# EAGLE board Melanie-AD (EAGLE 4.11)
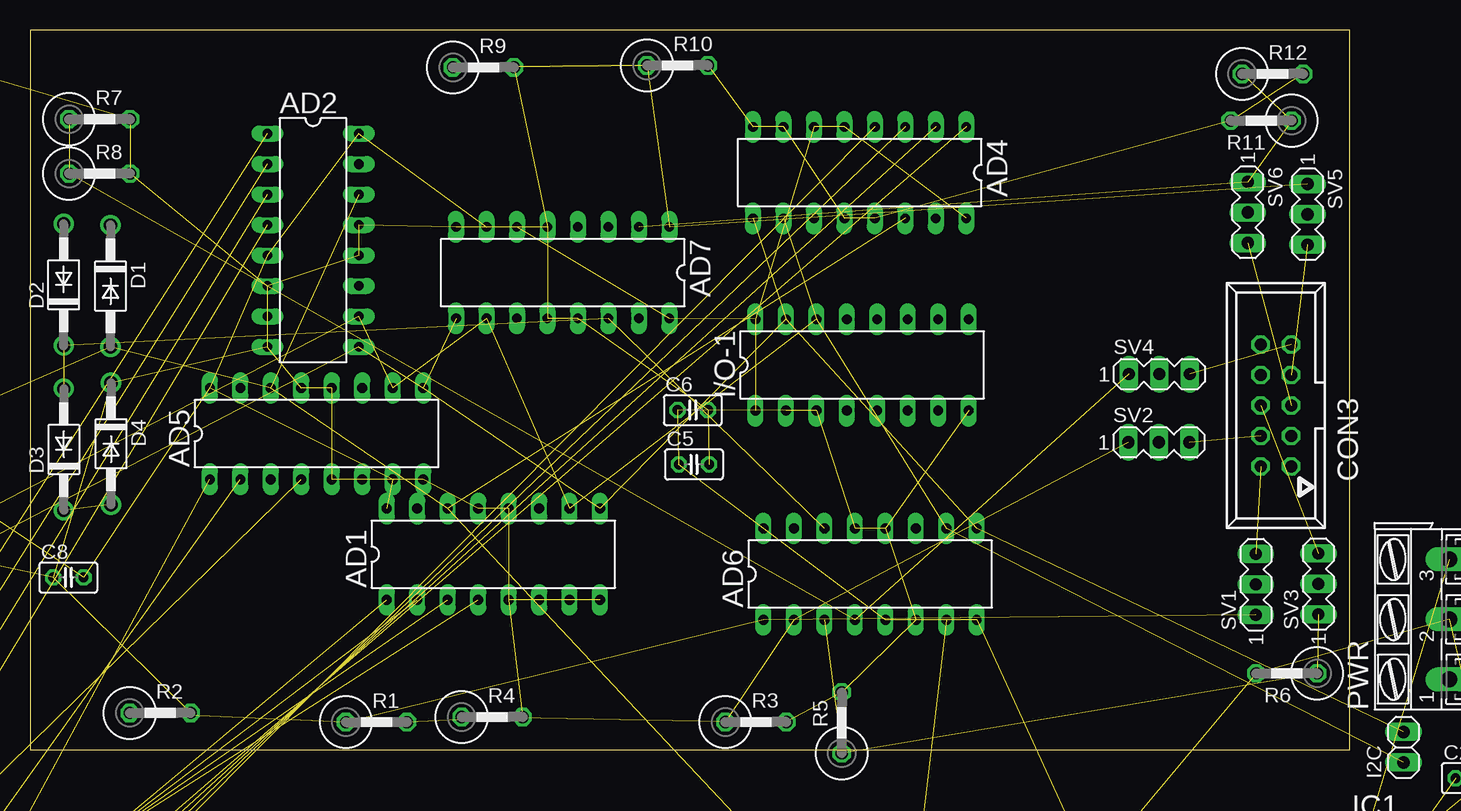
[diagram p0: board, top side]
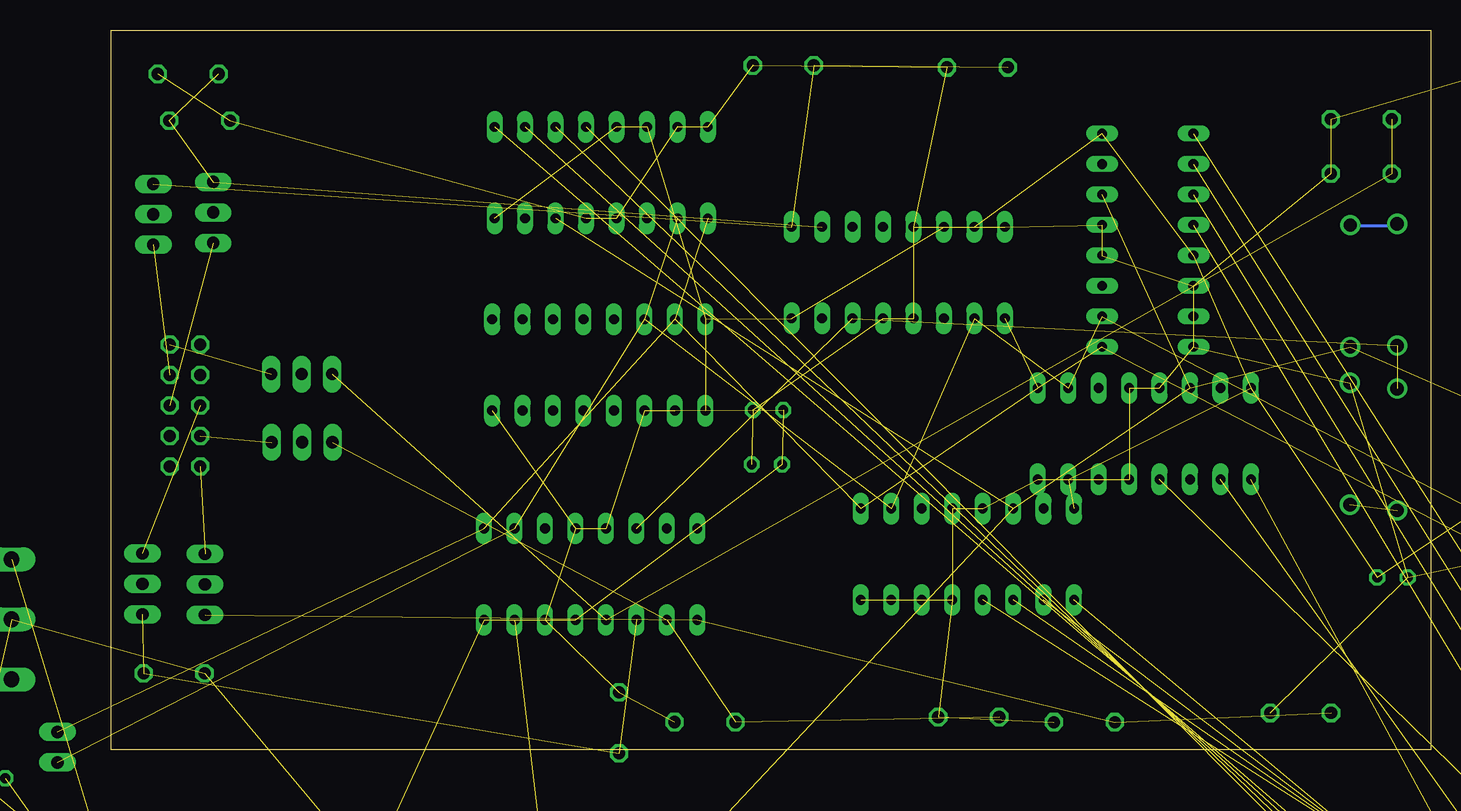
[diagram p1: board, bottom side, seen from below]

Size 110 x 60 mm. Coordinates in mm from the lower left corner, seen from the top.
Outline: 0,0 110,0 110,60 0,60 0,0
Copper layers (1*16): Top 0.035mm / dielectric 1.5mm / Bottom 0.035mm
Design rules "default": minimum track width 10mil, minimum drill 24mil, track to track 8mil, track to pad 8mil, pad to pad 8mil, via to via 8mil, smd to smd 8mil, copper to edge 40mil, drill to drill 8mil, minimum pad ring 10mil, minimum via ring 8mil, stop-mask expansion 4mil, vias tented up to drill 0mil, thermal gap 10mil

## Footprints (pad centres in the part's own frame; a part is rotated, then mirrored left to right if it is on the bottom)
DIL16 = drill 0.813 long: 1 -8.89,-3.81; 2 -6.35,-3.81; 3 -3.81,-3.81; 4 -1.27,-3.81; 5 1.27,-3.81; 6 3.81,-3.81; 7 6.35,-3.81; 8 8.89,-3.81; 9 8.89,3.81; 10 6.35,3.81; 11 3.81,3.81; 12 1.27,3.81; 13 -1.27,3.81; 14 -3.81,3.81; 15 -6.35,3.81; 16 -8.89,3.81
EB22,5D = drill 2.007 pad 4.597 round: + -5.08,0 | drill 2.007 pad 4.597 octagon: - 5.08,0
C025-025X050 = drill 0.813 octagon: 1 -1.27,0; 2 1.27,0
057-010-1 = drill 1 octagon: 1 -5.08,-1.27; 2 -5.08,1.27; 3 -2.54,-1.27; 4 -2.54,1.27; 5 0,-1.27; 6 0,1.27; 7 2.54,-1.27; 8 2.54,1.27; 9 5.08,-1.27; 10 5.08,1.27
DO41-10 = drill 1.118 round: A 5.08,0; C -5.08,0
1X02 = drill 1.016 long: 1 -1.27,0; 2 1.27,0
TO220H = drill 1.118 long: 1 -2.54,-10.16; 2 0,-10.16; 3 2.54,-10.16 | hole 3.302: 0,4.826
AK300/3 = drill 1.321 long: 1 -5.004,0; 2 0,0; 3 5.004,0
0414V = drill 1.016 octagon: 1 -2.54,0; 2 2.54,0
0309/10 = drill 0.813 octagon: 1 -5.08,0; 2 5.08,0
MA03-1 = drill 1.016 long: 1 -2.54,0; 2 0,0; 3 2.54,0

## Placement (x,y rotation side)
AD1  PCF8591P  [DIL16]  38.63,16.28 0 top
AD2  PCF8591P  [DIL16]  23.6,42.47 270 top
AD3  PCF8591P  [DIL16]  -20.45,19.54 270 top  (outside the outline)
AD4  PCF8591P  [DIL16]  69.16,48.11 180 top
AD5  PCF8591P  [DIL16]  23.88,26.34 0 top
AD6  PCF8591P  [DIL16]  70.04,14.63 0 top
AD7  PCF8591P  [DIL16]  44.4,39.76 180 top
C1  10000uF  [EB22,5D]  -22.23,-61.76 0 top  (outside the outline)
C2  100n  [C025-025X050]  120.11,-2.39 0 top  (outside the outline)
C3  100n  [C025-025X050]  87.2,-10.05 0 top  (outside the outline)
C4  100n  [C025-025X050]  -17.97,59.95 0 top  (outside the outline)
C5  100n  [C025-025X050]  55.35,23.77 0 top
C6  100n  [C025-025X050]  55.25,28.31 0 top
C7  10000uF  [EB22,5D]  -22.23,-84.62 0 top  (outside the outline)
C8  100n  [C025-025X050]  3.2,14.35 0 top
C9  10000uF  [EB22,5D]  -22.23,-107.48 0 top  (outside the outline)
C10  10000uF  [EB22,5D]  -22.23,-130.34 0 top  (outside the outline)
C11  10000uF  [EB22,5D]  -22.23,-153.2 0 top  (outside the outline)
C12  10000uF  [EB22,5D]  -22.23,-176.06 0 top  (outside the outline)
CON1  057-010-1  [057-010-1]  -24.77,-27.47 0 top  (outside the outline)
CON2  057-010-1  [057-010-1]  -24.77,-42.71 0 top  (outside the outline)
CON3  057-010-1  [057-010-1]  103.86,28.69 90 top
D1  1N4007  [DO41-10]  6.71,38.65 270 top
D2  1N4007  [DO41-10]  2.81,38.75 90 top
D3  1N4007  [DO41-10]  2.81,25.02 90 top
D4  1N4007  [DO41-10]  6.75,25.5 270 top
I2C  [1X02]  114.49,0.19 90 top  (outside the outline)
I/O-1  PCF8574P  [DIL16]  69.36,32.07 0 top
IC1  7805T  [TO220H]  121.09,-11.01 270 top  (outside the outline)
PWR  [AK300/3]  118.32,10.86 90 top  (outside the outline)
R1  1ohm  [0414V]  28.88,2.28 0 top
R2  1ohm  [0414V]  10.85,3.05 0 top
R3  1ohm  [0414V]  60.51,2.3 0 top
R4  1ohm  [0414V]  38.52,2.71 0 top
R5  1ohm  [0414V]  67.67,2.23 90 top
R6  1ohm  [0414V]  104.76,6.35 180 top
R7  1ohm  [0414V]  5.8,52.56 0 top
R8  1ohm  [0414V]  5.8,48.03 0 top
R9  1ohm  [0414V]  37.8,56.88 0 top
R10  1ohm  [0414V]  53.98,57.05 0 top
R11  1ohm  [0414V]  102.63,52.44 180 top
R12  1ohm  [0414V]  103.58,56.34 0 top
R13  3,3K  [0309/10]  68.76,-10.69 0 top  (outside the outline)
SV1  [MA03-1]  102.19,13.76 90 top
SV2  [MA03-1]  94.1,25.62 0 top
SV3  [MA03-1]  107.41,13.81 90 top
SV4  [MA03-1]  94.14,31.3 0 top
SV5  [MA03-1]  106.5,44.63 270 top
SV6  [MA03-1]  101.51,44.79 270 top

## Library data of the parts
AD1-AD7 I/O-1 = micro-philips
C1-C12 R1-R13 = rcl
CON1-CON3 = con-panduit
D1-D4 = diode
I2C = pinhead
IC1 = linear
PWR = con-ptr500
SV1-SV6 = con-lstb

## Nets
CURR1: AD6.1 R1.1 R2.1 SV1.1
CURR2: AD6.2 R3.1 R4.1 SV2.1
CURR3: AD6.3 R5.1 R6.1 SV3.1
CURR4: AD6.4 R7.1 R8.1 SV4.1
CURR5: AD7.1 R9.1 R10.1 SV5.1
CURR6: AD7.2 R11.1 R12.1 SV6.1
N$1: AD1.1 CON1.9
N$2: AD1.2 CON1.7
N$3: AD1.3 CON1.5
N$4: AD4.4 CON2.8
N$5: AD2.1 CON1.2
N$6: AD2.2 CON1.4
N$7: AD2.3 CON1.6
N$8: AD2.4 CON1.8
N$9: AD3.1 CON2.9
N$10: AD3.2 CON2.7
N$11: AD3.3 CON2.5
N$12: AD3.4 CON2.3
N$13: AD4.3 CON2.6
N$14: AD4.2 CON2.4
N$15: AD4.1 CON2.2
N$16: AD5.3
N$17: AD5.1 CON2.10
N$18: AD5.2 CON2.1
N$19: D3.C D4.A
N$20: SV1.2
N$21: AD1.4 CON1.3
N$22: SV2.2
N$23: SV3.2
N$24: SV4.2
N$25: SV5.2
N$26: SV6.2
N$27: D1.C D2.A
N$28: AD5.4 CON1.1
N$31: IC1.1 PWR.3
SCL: AD1.10 AD2.10 AD3.10 AD4.10 AD5.10 AD6.10 AD7.10 I2C.1 I/O-1.14
SDA: AD1.9 AD2.9 AD3.9 AD4.9 AD5.9 AD6.9 AD7.9 I2C.2 I/O-1.15
SV-SIG1: CON3.2 SV1.3
SV-SIG2: CON3.4 SV2.3
SV-SIG3: CON3.6 SV3.3
SV-SIG4: CON3.9 SV4.3
SV-SIG5: CON3.7 SV5.3
SV-SIG6: CON3.5 SV6.3
VCCSERVOS: PWR.1
VDD: AD1.16 AD2.5 AD2.16 AD3.6 AD3.16 AD4.5 AD4.6 AD4.16 AD5.7 AD5.16 AD6.5 AD6.7 AD6.16 AD7.6 AD7.7 AD7.16 C2.1 C3.1 C4.1 C5.1 C6.1 C8.2 I/O-1.1 I/O-1.16 IC1.3 R13.2
VREF-CURR: AD6.14 AD7.14 D2.C D3.A
VREF-POT: AD1.14 AD2.14 AD3.14 AD4.14 AD5.14 D1.A R13.1
VSS: AD1.5 AD1.6 AD1.7 AD1.8 AD1.12 AD1.13 AD2.6 AD2.7 AD2.8 AD2.12 AD2.13 AD3.5 AD3.7 AD3.8 AD3.12 AD3.13 AD4.7 AD4.8 AD4.12 AD4.13 AD5.5 AD5.6 AD5.8 AD5.12 AD5.13 AD6.6 AD6.8 AD6.12 AD6.13 AD7.5 AD7.8 AD7.12 AD7.13 C2.2 C3.2 C4.2 C5.2 C6.2 C8.1 D4.C I/O-1.2 I/O-1.3 I/O-1.8 IC1.2 PWR.2 R1.2 R2.2 R3.2 R4.2 R5.2 R6.2 R7.2 R8.2 R9.2 R10.2 R11.2 R12.2

## Tracks (layer width: path | path; a pad name or v marks a point on that pad's centre or on a via)
CURR1  (3 unrouted)
CURR2  (3 unrouted)
CURR3  (3 unrouted)
CURR4  (3 unrouted)
CURR5  (3 unrouted)
CURR6  (3 unrouted)
N$1  (1 unrouted)
N$2  (1 unrouted)
N$3  (1 unrouted)
N$4  (1 unrouted)
N$5  (1 unrouted)
N$6  (1 unrouted)
N$7  (1 unrouted)
N$8  (1 unrouted)
N$9  (1 unrouted)
N$10  (1 unrouted)
N$11  (1 unrouted)
N$12  (1 unrouted)
N$13  (1 unrouted)
N$14  (1 unrouted)
N$15  (1 unrouted)
N$17  (1 unrouted)
N$18  (1 unrouted)
N$19  (1 unrouted)
N$21  (1 unrouted)
N$27
  Bottom 0.254: D2.A 3.17,43.65 6.98,43.65 D1.C
N$28  (1 unrouted)
N$31  (1 unrouted)
SCL  (8 unrouted)
SDA  (8 unrouted)
SV-SIG1  (1 unrouted)
SV-SIG2  (1 unrouted)
SV-SIG3  (1 unrouted)
SV-SIG4  (1 unrouted)
SV-SIG5  (1 unrouted)
SV-SIG6  (1 unrouted)
VDD  (25 unrouted)
VREF-CURR  (3 unrouted)
VREF-POT  (6 unrouted)
VSS  (56 unrouted)
  Bottom 0.254: AD5.13 22.22,29.68 | AD5.5 24.76,22.06